# Altium PCB Main.PcbDoc
Units mm, origin at the board's own origin, x right, y up, seen from the top; angles counter-clockwise.
Board outline 45 x 67 mm, 4 copper layers (Top Layer, Ground Layer, Power Layer, Bottom Layer), stack 1.591 mm thick; 17 components, 13 nets, 63 pads, 5 vias.
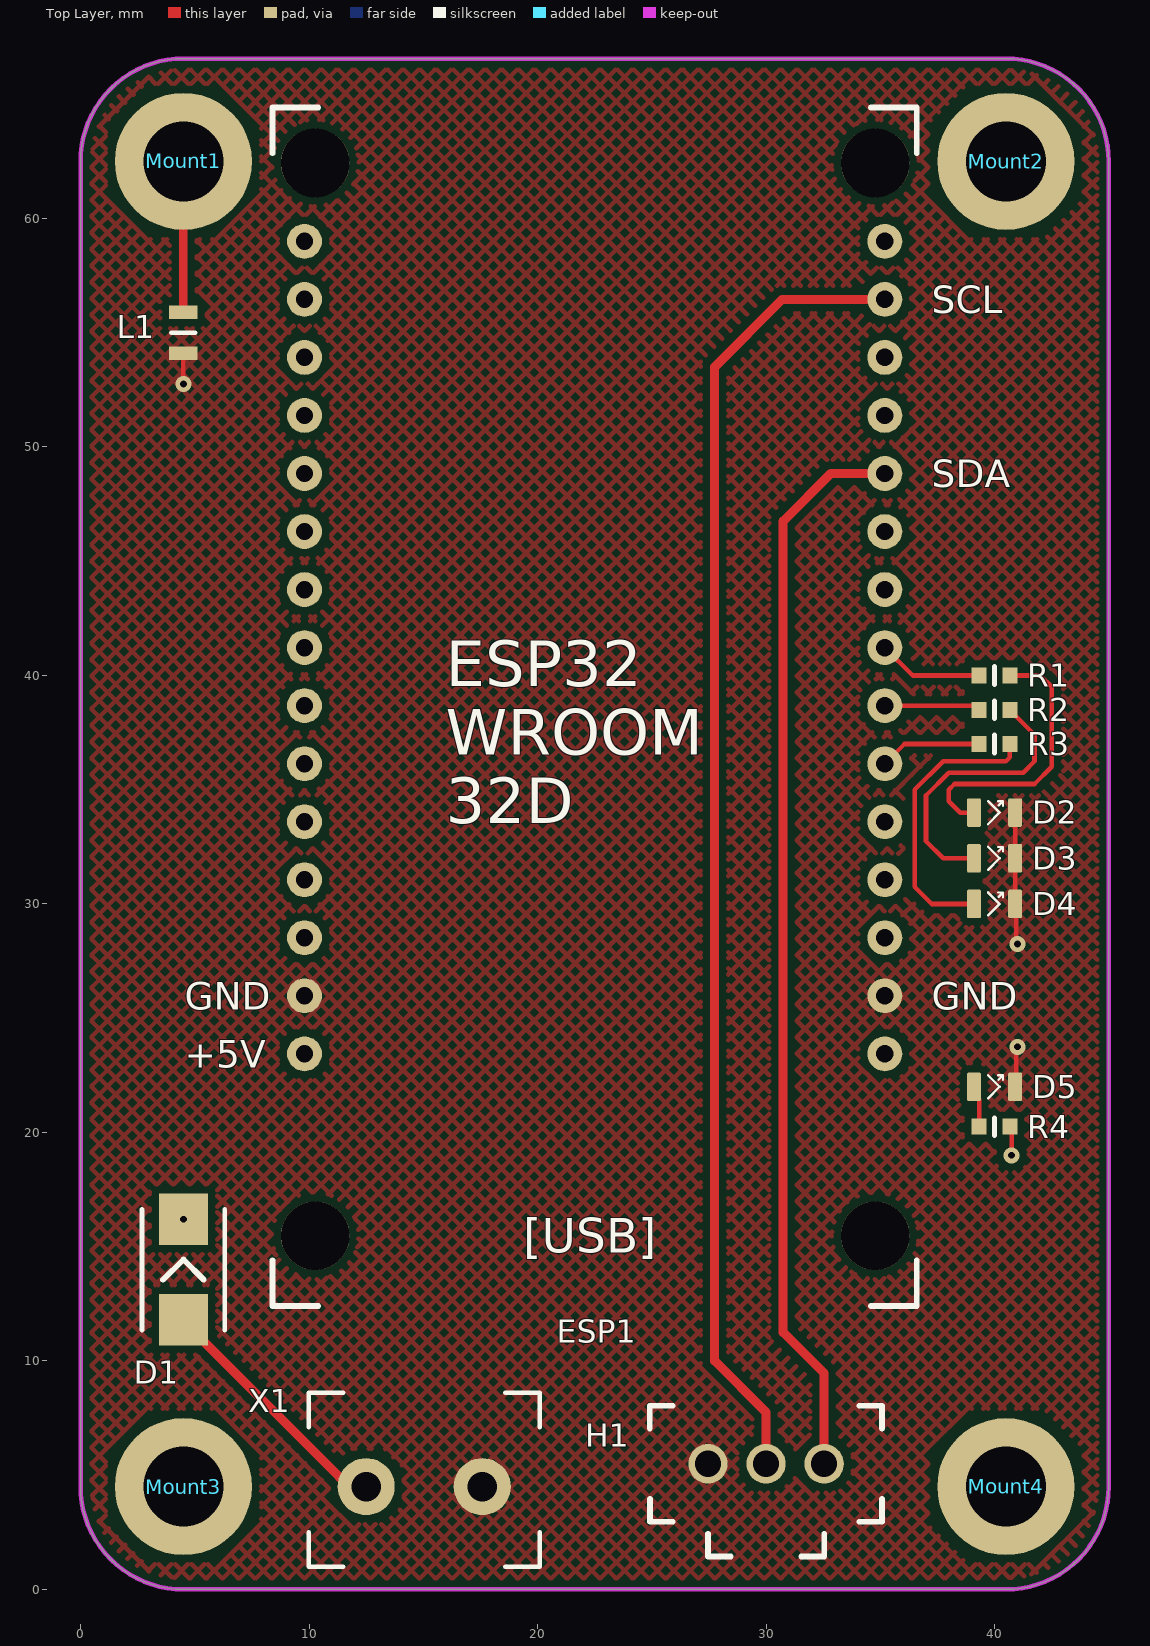
[diagram p0: Top Layer view]
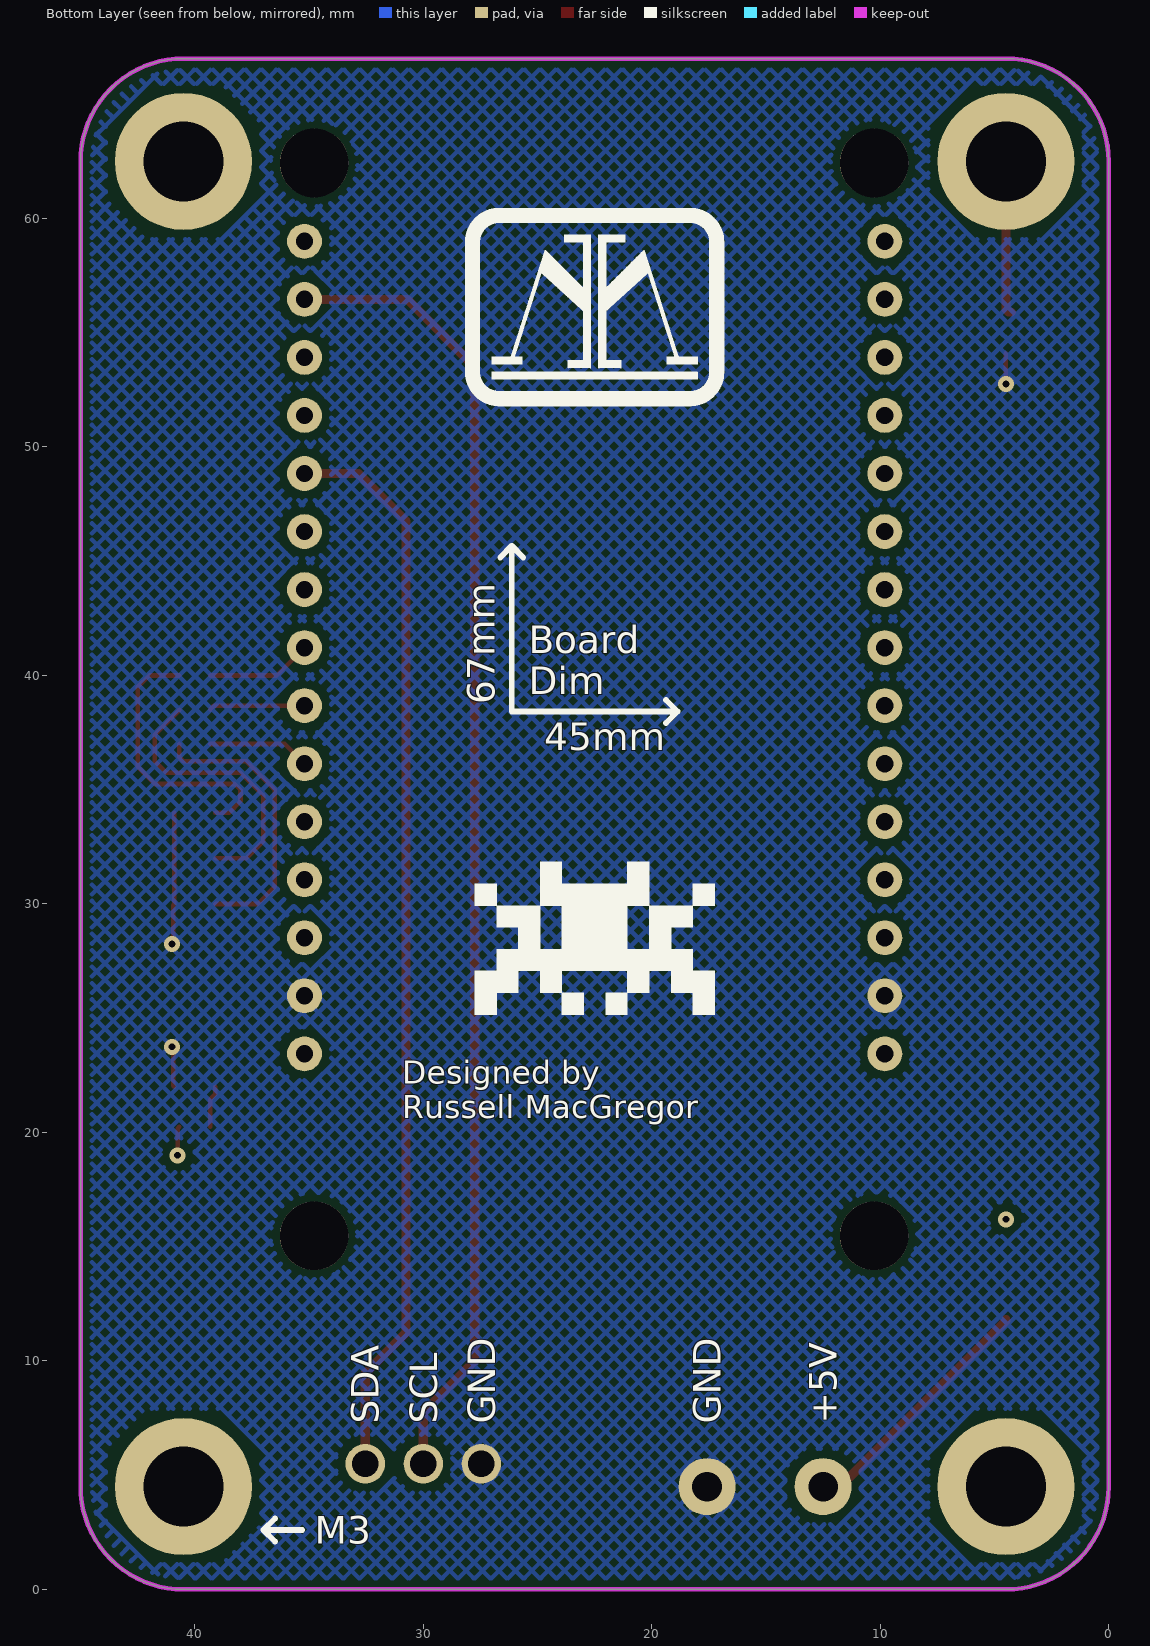
[diagram p1: Bottom Layer view, seen from below]
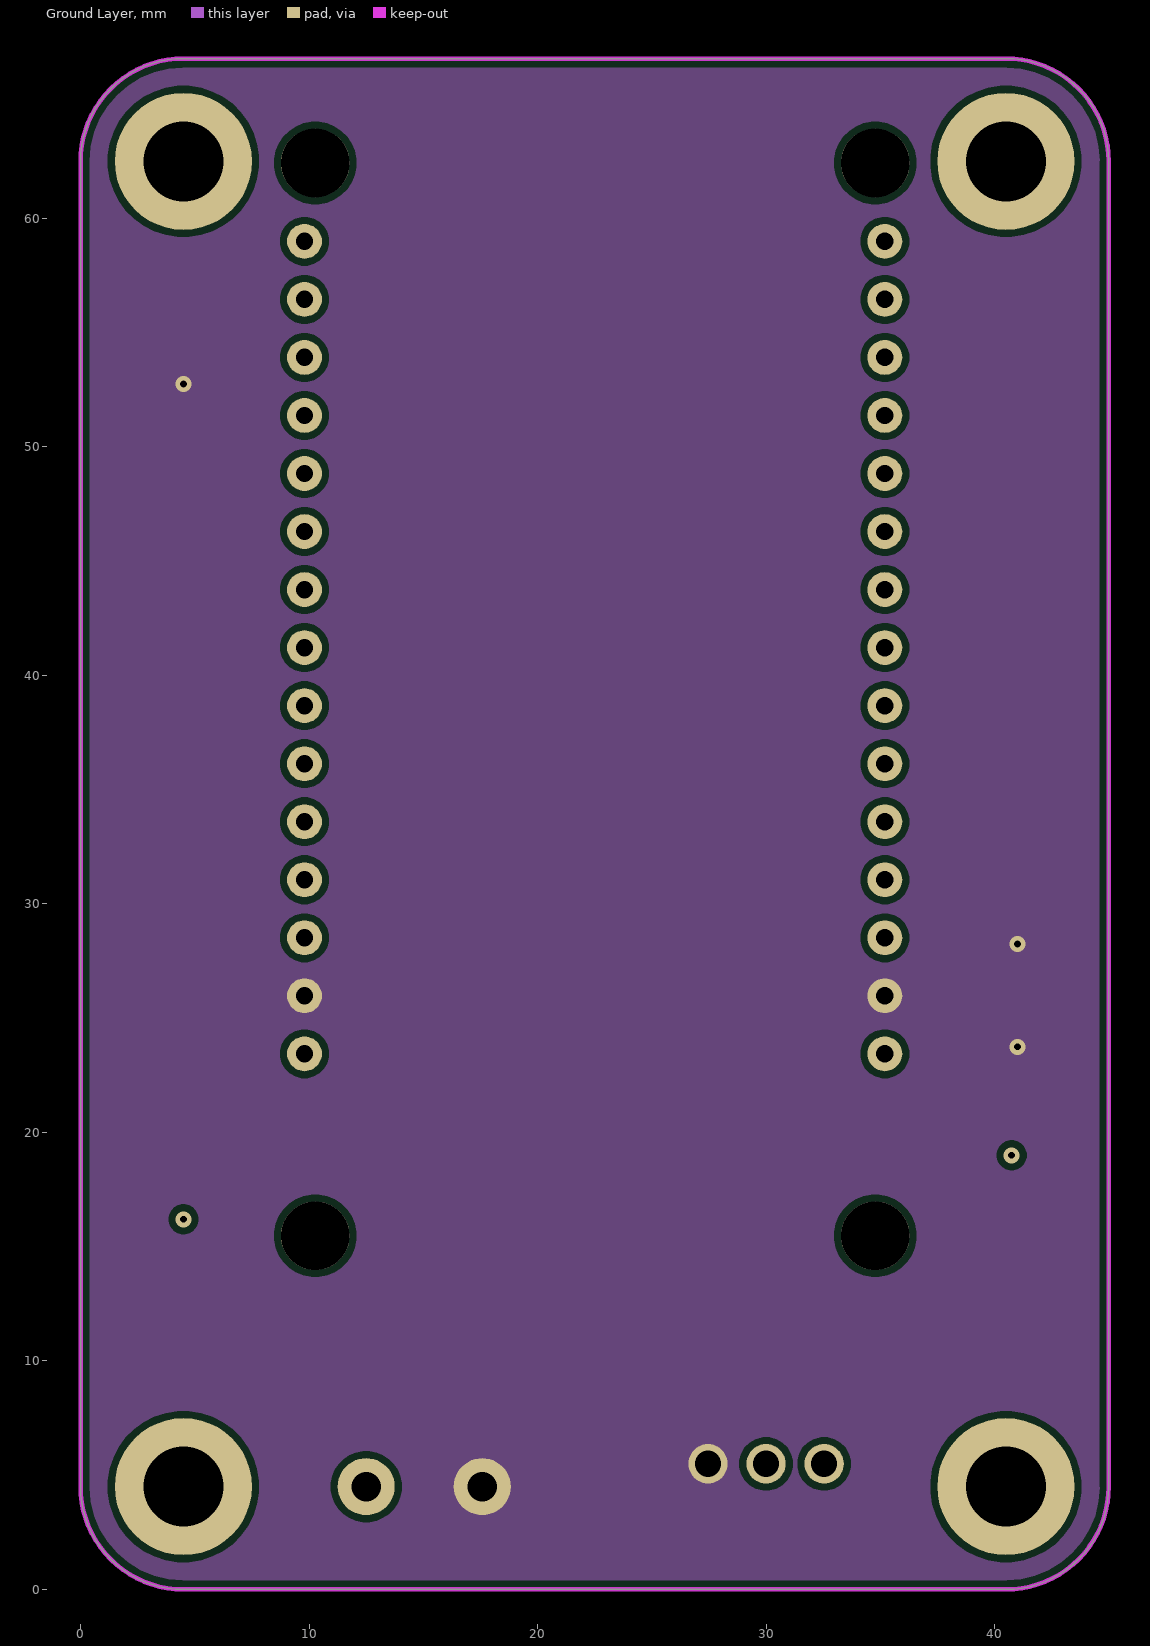
[diagram p2: Ground Layer]
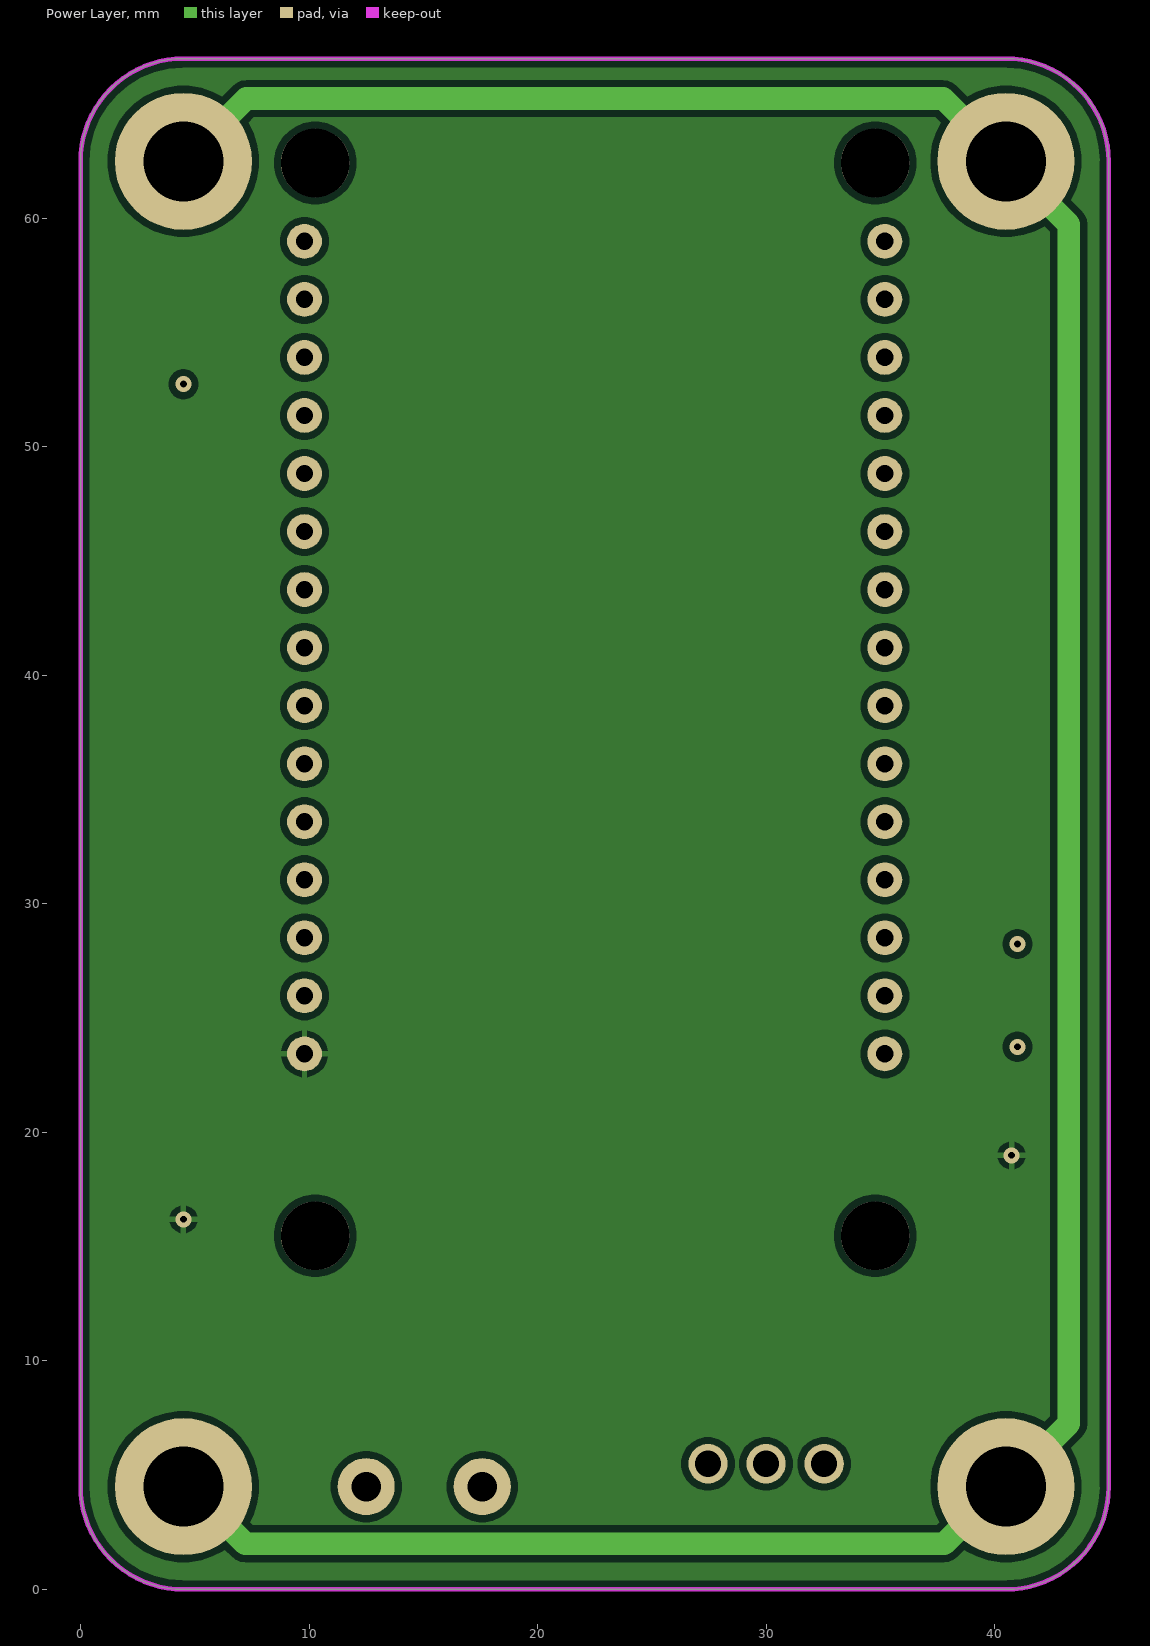
[diagram p3: Power Layer]
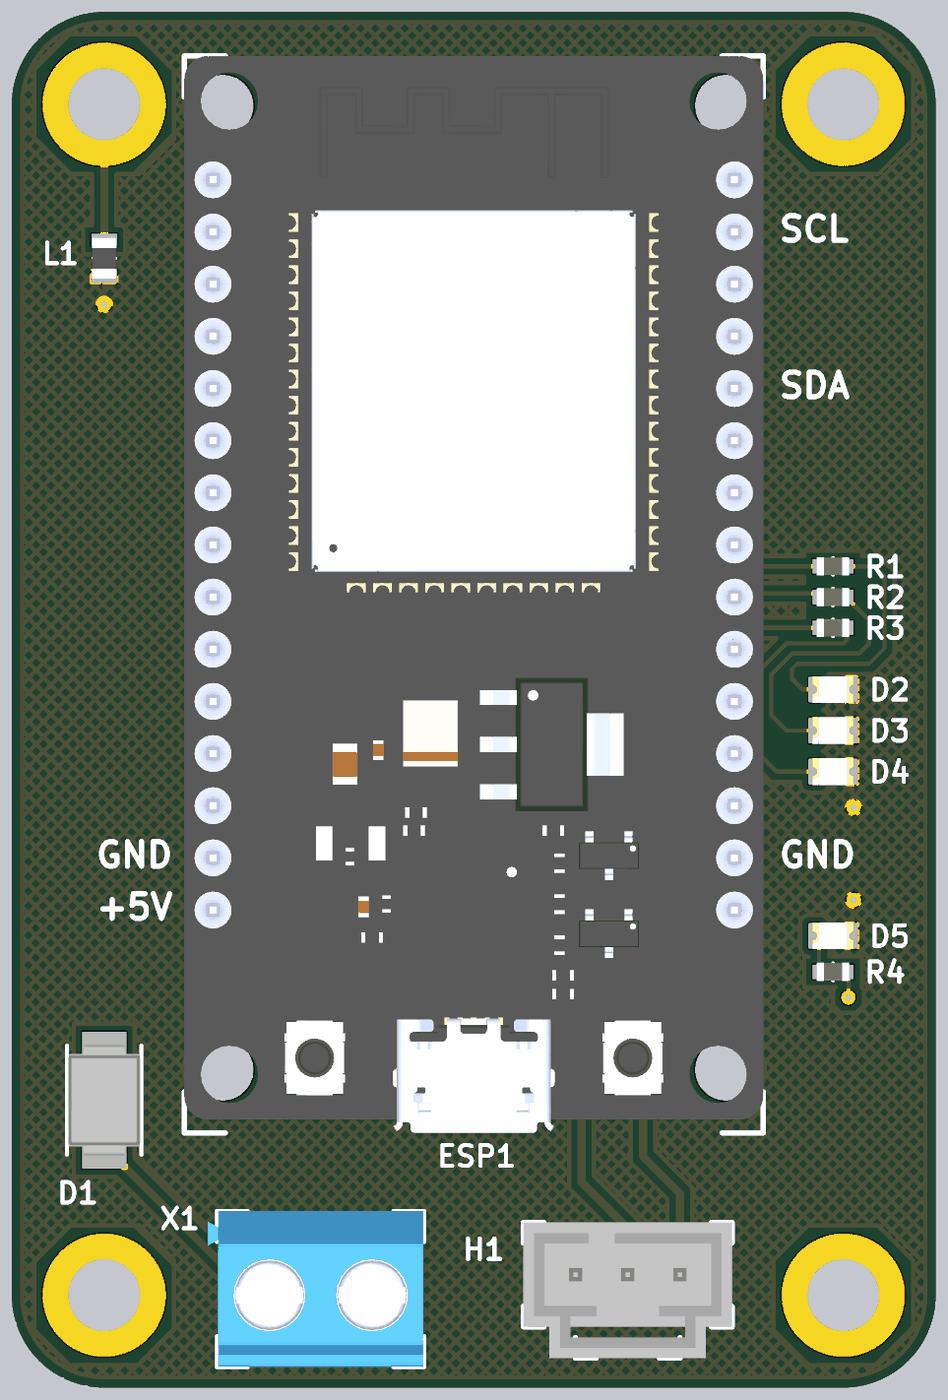
[diagram p4: 3D render of the assembled board from above, using the file's embedded part models]

## Layer stack, top to bottom
Top Solder: solder mask 0.0102, Solder Resist, Dk 3.8
Top Layer: signal copper 0.035
Dielectric 2: prepreg 0.2104, 7628*1, Dk 4.4
Ground Layer: signal copper 0.0175
Dielectric 1: dielectric 1.065, FR-4, Dk 4.8
Power Layer: signal copper 0.0175
Dielectric 3: prepreg 0.2104, 7628*1, Dk 4.4
Bottom Layer: signal copper 0.035
Bottom Solder: solder mask 0.0102, Solder Resist, Dk 3.8

## Board outline
0,4.5 0,62.5 cw(c4.5,62.5) 4.5,67 40.5,67 cw(c40.5,62.5) 45,62.5 45,4.5 cw(c40.5,4.5) 40.5,0 4.5,0 cw(c4.5,4.5)

## Design rules (kind name [scope] priority, off if disabled: settings)
BoardOutlineClearance [All] p1: gap=0.2 ignorepadtopadclearanceinfootprint=FALSE
Clearance "inPolygon Clearance" [InPolygon] p1: gap=0.3 ignorepadtopadclearanceinfootprint=TRUE // this rule ensures that every net within a polygon of a different net has a set clearance from the poly
Clearance "Different Diff Pair" [All] p2: gap=0.2 ignorepadtopadclearanceinfootprint=TRUE
Clearance "Same Diff Pair" [All] p3: gap=0.1 ignorepadtopadclearanceinfootprint=TRUE
Clearance "Different Nets" [not InAnyDifferentialPair] p4: gap=0.3 ignorepadtopadclearanceinfootprint=TRUE except(0.1: Arc-SMDPad Arc-THPad Arc-Via Arc-Text Track-SMDPad Track-THPad Track-Via Track-Text SMDPad-Text THPad-Text Via-Text Fill-Text Poly-Text Region-Text Text-Text; 0.12: Arc-Arc Arc-Track Track-Track; 0.15: SMDPad-SMDPad SMDPad-THPad SMDPad-Via THPad-THPad THPad-Via Via-Via; 0.2: Arc-Hole Track-Hole SMDPad-Hole THPad-Hole Via-Hole Fill-Hole Poly-Hole Region-Hole Text-Hole)
Clearance "Same Net" [not InAnyDifferentialPair] p5: gap=0 ignorepadtopadclearanceinfootprint=TRUE except(0.1: THPad-Via; 0.18: Arc-Arc Arc-Track Track-Track)
ComponentClearance [All] p1: gap=0.102 collisioncheckmode=3 verticalgap=0.102 showdistances=TRUE
DiffPairsRouting "Ethernet Routing" [InDifferentialPairClass('Ethernet_Pairs')] p1: maxlimit=0.25 minlimit=0.2 mostfreqgap=0.25 toplayer_maxgap=0.2 toplayer_prefgap=0.2 toplayer_minwidth=0.25 toplayer_maxwidth=0.25 toplayer_prefwidth=0.25 midlayer1_mingap=0.25 midlayer1_minwidth=0.19 midlayer1_maxwidth=0.19 midlayer1_prefwidth=0.19 midlayer2_mingap=0.25 midlayer2_minwidth=0.19 midlayer2_maxwidth=0.19 midlayer2_prefwidth=0.19 bottomlayer_maxgap=0.2 bottomlayer_prefgap=0.2 bottomlayer_minwidth=0.25 bottomlayer_maxwidth=0.25 bottomlayer_prefwidth=0.25 impedanceprofiledriven=TRUE maxuncoupledlength=12.7
DiffPairsRouting "USB Routing" [InDifferentialPairClass('USB_Pairs')] p2: maxlimit=0.291 minlimit=0.127 mostfreqgap=0.291 toplayer_maxgap=0.127 toplayer_prefgap=0.127 toplayer_minwidth=0.23 toplayer_maxwidth=0.23 toplayer_prefwidth=0.23 midlayer1_mingap=0.291 midlayer1_minwidth=0.25 midlayer1_maxwidth=0.25 midlayer1_prefwidth=0.25 midlayer2_mingap=0.291 midlayer2_minwidth=0.25 midlayer2_maxwidth=0.25 midlayer2_prefwidth=0.25 bottomlayer_maxgap=0.127 bottomlayer_prefgap=0.127 bottomlayer_minwidth=0.23 bottomlayer_maxwidth=0.23 bottomlayer_prefwidth=0.23 impedanceprofiledriven=TRUE maxuncoupledlength=12.7
DiffPairsRouting "CAN Routing" [InDifferentialPairClass('CAN_Pairs')] p3: maxlimit=0.907 minlimit=0.5 mostfreqgap=0.907 toplayer_maxgap=0.5 toplayer_prefgap=0.5 toplayer_minwidth=0.201 toplayer_maxwidth=0.201 toplayer_prefwidth=0.201 midlayer1_mingap=0.907 midlayer1_minwidth=0.155 midlayer1_maxwidth=0.155 midlayer1_prefwidth=0.155 midlayer2_mingap=0.907 midlayer2_minwidth=0.155 midlayer2_maxwidth=0.155 midlayer2_prefwidth=0.155 bottomlayer_maxgap=0.5 bottomlayer_prefgap=0.5 bottomlayer_minwidth=0.201 bottomlayer_maxwidth=0.201 bottomlayer_prefwidth=0.201 impedanceprofiledriven=TRUE maxuncoupledlength=12.7
Height [All] p1: minheight=0 maxheight=1816.048 prefheight=12.7
HoleSize [All] p1: absolutevalues=TRUE maxlimit=6.3 minlimit=0.3 maxpercent=80.000 minpercent=20.000
HoleToHoleClearance [All] p1: gap=0.25 allowstackedmicrovias=FALSE
Length [All] p1: maxlimit=43.432 minlimit=0 usedelayunits=TRUE mindelay=0.000000 maxdelay=10000.000000
MatchedLengths "Diff Pair Matched Delays" [InDifferentialPairClass('Ethernet_Pairs') or InDifferentialPairClass('USB_Pairs') or InDifferentialPairClass('CAN_Pairs')] p1: tolerance=5 checknetsindiffpair=TRUE checkdiffpairvsdiffpair=FALSE checkxsignals=FALSE checkothers=FALSE usedelayunits=TRUE delaytolerance=100.000000
MinimumAnnularRing [All] p1: minimumring=0.2
MinimumSolderMaskSliver [All] p1: minsoldermaskwidth=0
PlaneClearance "Supply Net Clearance" [InNetClass('Supply_Nets')] p1: clearance=0.5
PlaneClearance "All Nets" [All] p2: clearance=0.3
PolygonConnect "Supply Nets" [InNetClass('Supply_Nets')] p1: connectstyle=Direct reliefconductorwidth=0.3 reliefentries=4 polygonreliefangle="90 Angle" airgapwidth=0.254
PolygonConnect General [All] p2: connectstyle=Relief reliefconductorwidth=0.254 reliefentries=4 polygonreliefangle="90 Angle" airgapwidth=0.254
RoutingVias [All] p1: holewidth=0.2 width=0.35 viastyle="Through Hole" minholewidth=0.15 minwidth=0.3 maxholewidth=6.3 maxwidth=6.55
SilkToSilkClearance [All] p1: silktosilkclearance=0
SilkToSolderMaskClearance [All] p1: minsilkscreentomaskgap=0 clearancetoexposedcopper=TRUE
SolderMaskExpansion [All] p1: expansion=0.075 istentingtop=FALSE
SupplyNets "Schematic Supply Nets" [InNet('+5V')] p1: voltage=0.000
SupplyNets "Schematic Supply Nets_3" [InNet('GND')] p2: voltage=0.000
SupplyNets "Schematic Supply Nets_1" [InNet('Earth')] p3: voltage=0.000
UnRoutedNet [All] p1: checkbadconnections=TRUE
Width "nRF Width" [InNetClass('nRF Signal')] p1: maxlimit=0.379 minlimit=0.263 preferedwidth=0.379 toplayer_minwidth=0.379 midlayer1_maxwidth=0.263 midlayer1_prefwidth=0.263 midlayer2_maxwidth=0.263 midlayer2_prefwidth=0.263 bottomlayer_minwidth=0.379 impedanceprofiledriven=TRUE minimp=50.000000 maximp=50.000000 favimp=50.000000 checkconnectedcopper=TRUE
Width [All] p2: maxlimit=100 minlimit=0.1 preferedwidth=0.3
20 further rules are at their usual default settings.

## Classes and differential pairs
net class Supply_Nets: Earth GND

## Components (designator, comment, footprint, x,y, rotation, side; value= is the part's Value field where it differs from the comment)
D1 "Schottky" "[Diode] SMD DO-214AA" 4.5,14 r90 top
D2 "SMD LED" "[LED] SMD 0805" 40,34 r0 top
D3 "SMD LED" "[LED] SMD 0805" 40,32 r0 top
D4 "SMD LED" "[LED] SMD 0805" 40,30 r0 top
D5 "SMD LED" "[LED] SMD 0805" 40,22 r0 top
ESP1 "ESP32-WROOM-32D" "[Device] ESP32-WROOM-32D" 22.5,59 r0 top
H1 "1x3 Male" "[Header] Shrouded 1x3 Male" 30,5.5 r180 top
L1 "652-MH2029-300Y" "[Ferrite] SMD Bead 0805 (1)" 4.5,55 r270 top
Mount1 "M3 Mount Hole" "[Mount] M3 Mount Hole" 4.5,62.5 r0 top
Mount2 "M3 Mount Hole" "[Mount] M3 Mount Hole" 40.5,62.5 r0 top
Mount3 "M3 Mount Hole" "[Mount] M3 Mount Hole" 4.5,4.5 r0 top
Mount4 "M3 Mount Hole" "[Mount] M3 Mount Hole" 40.5,4.5 r0 top
R1 "[Res] SMD Resistor" "[Res] SMD 0603" 40,40 r180 top
R2 "[Res] SMD Resistor" "[Res] SMD 0603" 40,38.5 r180 top
R3 "[Res] SMD Resistor" "[Res] SMD 0603" 40,37 r180 top
R4 "[Res] SMD Resistor" "[Res] SMD 0603" 40,20.25 r0 top
X1 "2pin Screw Terminal" "[Screw Terminal] 2pin 5mm" 15,4.5 r0 top

## Footprints (in the part's own frame and the unit in brackets; to place one, negate y for a bottom-side part, rotate by r counter-clockwise, add the part's x,y. Pads: shape width x height; smd on the part's side, far side on the other; paste and mask are expansions set on the pad)
"[Device] ESP32-WROOM-32D" [mil] "ESP32 DEVKIT V1 - DOIT"
  round 60 hole 30: 1(-500,0) 2(-500,-100) 3(-500,-200) 4(-500,-300) 5(-500,-400) 6(-500,-500) 7(-500,-600) 8(-500,-700) 9(-500,-800) 10(-500,-900) 11(-500,-1000) 12(-500,-1100) 13(-500,-1200) 14(-500,-1300) 15(-500,-1400) 16(500,-1400) 17(500,-1300) 18(500,-1200) 19(500,-1100) 20(500,-1000) 21(500,-900) 22(500,-800) 23(500,-700) 24(500,-600) 25(500,-500) 26(500,-400) 27(500,-300) 28(500,-200) 29(500,-100) 30(500,0)
  round 118.11 hole 118.11 unplated: ""(-481.5,-1713.39) ""(-481.5,135.04) ""(483.46,-1713.39) ""(483.46,135.04)
  silkscreen extent -555,-1834 555,231, body extent -555,-1834 555,231, height 278
"[Diode] SMD DO-214AA" [mm]
  rect 2.25x2.15 smd: 1(2.2,0) 2(-2.2,0)
  silkscreen extent -2.65,-1.81 2.65,1.81, body extent -2.68,-1.75 2.68,1.75, height 2.3
"[Ferrite] SMD Bead 0805 (1)" [mm]
  rect 0.6x1.25 smd: 1(-0.9,0) 2(0.9,0)
  silkscreen extent 0,-0.53 0,0.53, body extent -1,-0.6 1,0.6, height 1.1
"[Header] Shrouded 1x3 Male" [mm] "070543-0037 / Mates with 005057-9403"
  round 1.725 hole 1.15: 1(-2.54,0) 2(0,0) 3(2.54,0)
  silkscreen extent -5.08,-2.54 5.09,4.06, body extent -5.08,-2.54 5.08,4.06, height 11.67
"[LED] SMD 0805" [mm]
  rrect20% 0.6x1.25 smd: 1(-0.9,0) 2(0.9,0)
  silkscreen extent -0.28,-0.51 0.37,0.51, body extent -1,-0.65 1,0.65, height 0.8
"[Mount] M3 Mount Hole" [mm] "Place at least 4.5mm from board edge. Plated."
  round 6 hole 3.5: 1(0,0)
"[Res] SMD 0603" [mm]
  rect 0.65x0.7 smd: 1(-0.675,0) 2(0.675,0)
  silkscreen extent 0,-0.4 0,0.4, body extent -0.8,-0.45 0.8,0.45, height 0.8
"[Screw Terminal] 2pin 5mm" [mm]
  round 2.5 hole 1.3: 1(-2.5,0) 2(2.58,0)
  silkscreen extent -5.01,-3.5 5.09,4.1, body extent -5.45,-3.5 5.05,4.1, height 9.99

## Part data
D1: library part "[Diode] SMD Schottky", "Generic", Size Package=DO-214AA, Supplier Part Number 1=S1MB-FDICT-ND, Supplier 1=DigiKey
D2 D3 D4 D5: library part "[LED] SMD", "Generic", Color=Green, Size Package=0805, Supplier Part Number 1=475-LGR971-KN-1DKR-ND, Supplier 1=DigiKey
ESP1: library part "[Device] ESP32-WROOM-32D", "ESP32 DEVKIT V1 - DOIT", ComponentLink1Description=Pinout, ComponentLink1URL=https://esp32.com/viewtopic.php?t=9875
H1: library part "[Header] Shrouded 1x3 Male", "070543-0037 / Mates with 005057-9403", Supplier Part Number 1=WM4825-ND, Supplier 1=DigiKey, Supplier 2=DigiKey, Supplier Part Number 2=WM2901-ND
L1: library part "[Ferrite] SMD Ferrite Bead (1)", Res @ Freq="30 @ 100MHz", Size Package=0805, Supplier Part Number 1=MH2029-300YCT-ND, Supplier 1=DigiKey
Mount1 Mount2 Mount3 Mount4: library part "[Mount] M3 Mount Hole", "Place at least 4.5mm from board edge. Plated."
R1 R2 R3 R4: "Generic", Resistance=220, Size Package=0603, Supplier Part Number 1=A129741CT-ND, Tolerance=5%, Supplier 1=DigiKey
X1: library part "[Screw Terminal] 2pin", Supplier Part Number 1=102-6145-ND, Supplier 1=DigiKey

## Via types
v1: diameter 0.7, hole 0.3, Top Layer to Bottom Layer, 5 vias

## Nets (pads, with @x,y where several pads share a name; then routed paths per layer and width w, separated by ;. In a path a pad name is that pad's centre, name@x,y a point inside that pad or via, vN(x,y) a via of type N, cw(c..) or ccw(c..) an arc to the next point about the centre after c; other vN are vias at no path point)
+5V: D1.1 ESP1.15 R4.2 | length 1.3
  Top Layer w0.2: R4.2 40.75,20.175 v1(40.75,19)
  other v1: 4.5,16.2
Earth: L1.1 Mount1.1 Mount2.1 Mount3.1 Mount4.1 | length 144.6
  Top Layer w0.381: L1.1@4.25,55.9 4.391,55.9 4.5,56.009 Mount1.1
  Power Layer w1: Mount3.1 5.75,4.5 5.75,3.454 7.204,2 37.796,2 40.296,4.5 Mount4.1 40.5,5.5 41.5,5.5 43.25,7.25 43.25,59.75 Mount2.1 37.75,65.25 7.25,65.25 Mount1.1
GND: D2.2 D3.2 D4.2 D5.2 ESP1.14 ESP1.17 H1.3 L1.2 X1.2 | length 8.9
  Top Layer w0.2: v1(4.5,52.75) L1.2 ; D5.2 40.95,22.05 40.95,23.7 v1(41,23.75) ; D2.2 D3.2 D4.2 40.95,29.95 40.95,28.3 v1(41,28.25)
LED1: ESP1.23 R1.2 | length 4.6
  Top Layer w0.2: ESP1.23 36.42,40 R1.2
LED2: ESP1.22 R2.2 | length 4.2
  Top Layer w0.2: ESP1.22 39.17,38.68 39.325,38.525 R2.2
LED3: ESP1.21 R3.2 | length 4.5
  Top Layer w0.2: ESP1.21 36.06,37 R3.2
NetD1_2: D1.2 X1.1 | length 11.1
  Top Layer w0.4: D1.2 4.5,11.75 11.345,4.905 12.095,4.905 X1.1
NetD2_1: D2.1 R1.1 | length 12.3
  Top Layer w0.2: D2.1 38.5,34 38,34.5 38,35 38.25,35.25 41.75,35.25 42.5,36 42.5,39.5 42,40 R1.1
NetD3_1: D3.1 R2.1 | length 12.5
  Top Layer w0.2: D3.1 37.75,32 37,32.75 37,34.75 38,35.75 41.25,35.75 41.75,36.25 41.75,37.4 40.675,38.475 R2.1
NetD4_1: D4.1 R3.1 | length 12.5
  Top Layer w0.2: D4.1 37.25,30 36.5,30.75 36.5,35 37.75,36.25 40.5,36.25 40.675,36.425 R3.1
NetD5_1: D5.1 R4.1 | length 1.8
  Top Layer w0.2: D5.1 39.1,21.675 39.325,21.45 R4.1
SCL: ESP1.29 H1.2 | length 57.6
  Top Layer w0.4: H1.2 30,7.75 27.75,10 27.75,53.5 30.71,56.46 ESP1.29
SDA: ESP1.26 H1.1 | length 47.3
  Top Layer w0.4: H1.1 32.54,9.46 30.75,11.25 30.75,46.75 32.84,48.84 ESP1.26
pads on no net: ESP1. ESP1.1 ESP1.2 ESP1.3 ESP1.4 ESP1.5 ESP1.6 ESP1.7 ESP1.8 ESP1.9 ESP1.10 ESP1.11 ESP1.12 ESP1.13 ESP1.16 ESP1.18 ESP1.19 ESP1.20 ESP1.24 ESP1.25 ESP1.27 ESP1.28 ESP1.30

## Polygon pours and split planes (outlines as drawn)
GND on Ground Layer "GND Poly" (solid, remove dead copper, pour order 0): 0,67 0,0 45,0 45,67
+5V on Power Layer "+5V Power Poly Poly" (solid, remove dead copper, pour order 1): 0,67 0,0 45,0 45,67
GND on Top Layer "Top GND Poly" (hatched 45Degree grid 0.508 track 0.203, remove dead copper, pour order 2): 0,67 0,0 45,0 45,67
GND on Bottom Layer "Bottom GND Poly" (hatched 45Degree grid 0.508 track 0.203, remove dead copper, pour order 3): 0,67 0,0 45,0 45,67

## Keep-outs
Keep-Out Layer:
  the board outline again, w0.2

## Silkscreen, mask and mechanical layers (free items; w line width, h text height)
Top Overlay:
  text "SCL" at 37.25,55.86 h1.2
  text "SDA" at 37.25,48.24 h1.2
  text "GND" at 4.551,25.38 h1.2
  text "GND" at 37.25,25.38 h1.2
  text "+5V" at 4.551,22.84 h1.2
Bottom Overlay:
  drawing of 18 lines, arcs and shapes, not listed
  text "Board" at 25.375,40.974 h1.2
  text "Dim" at 25.375,39.174 h1.2
  text "67mm" at 26.875,38.75 h1.2 r270
  text "45mm" at 24.699,36.724 h1.2
  text "Designed by / Russell MacGregor" at 30.922,20.627 h1
  text "+5V" at 11.9,7.25 h1.2 r270
  text "GND" at 16.98,7.25 h1.2 r270
  text "GND" at 26.86,7.25 h1.2 r270
  text "SCL" at 29.4,7.25 h1.2 r270
  text "SDA" at 31.94,7.25 h1.2 r270
  text "M3" at 34.75,2 h1.2

## Text inside footprints (layer, text, board x,y; h text height)
ESP1: Top Overlay "ESP32 / WROOM / 32D" at 15.988,33.529 h2; Top Overlay "[USB]" at 19.376,14.73 h1.5